# Altium PCB module_esppcb.PcbDoc
Units mm, origin at the board's own origin, x right, y up, seen from the top; angles counter-clockwise.
Board outline 67.63 x 92.03 mm, 2 copper layers (Top Layer, Bottom Layer); 21 components, 45 nets, 126 pads, 71 vias.
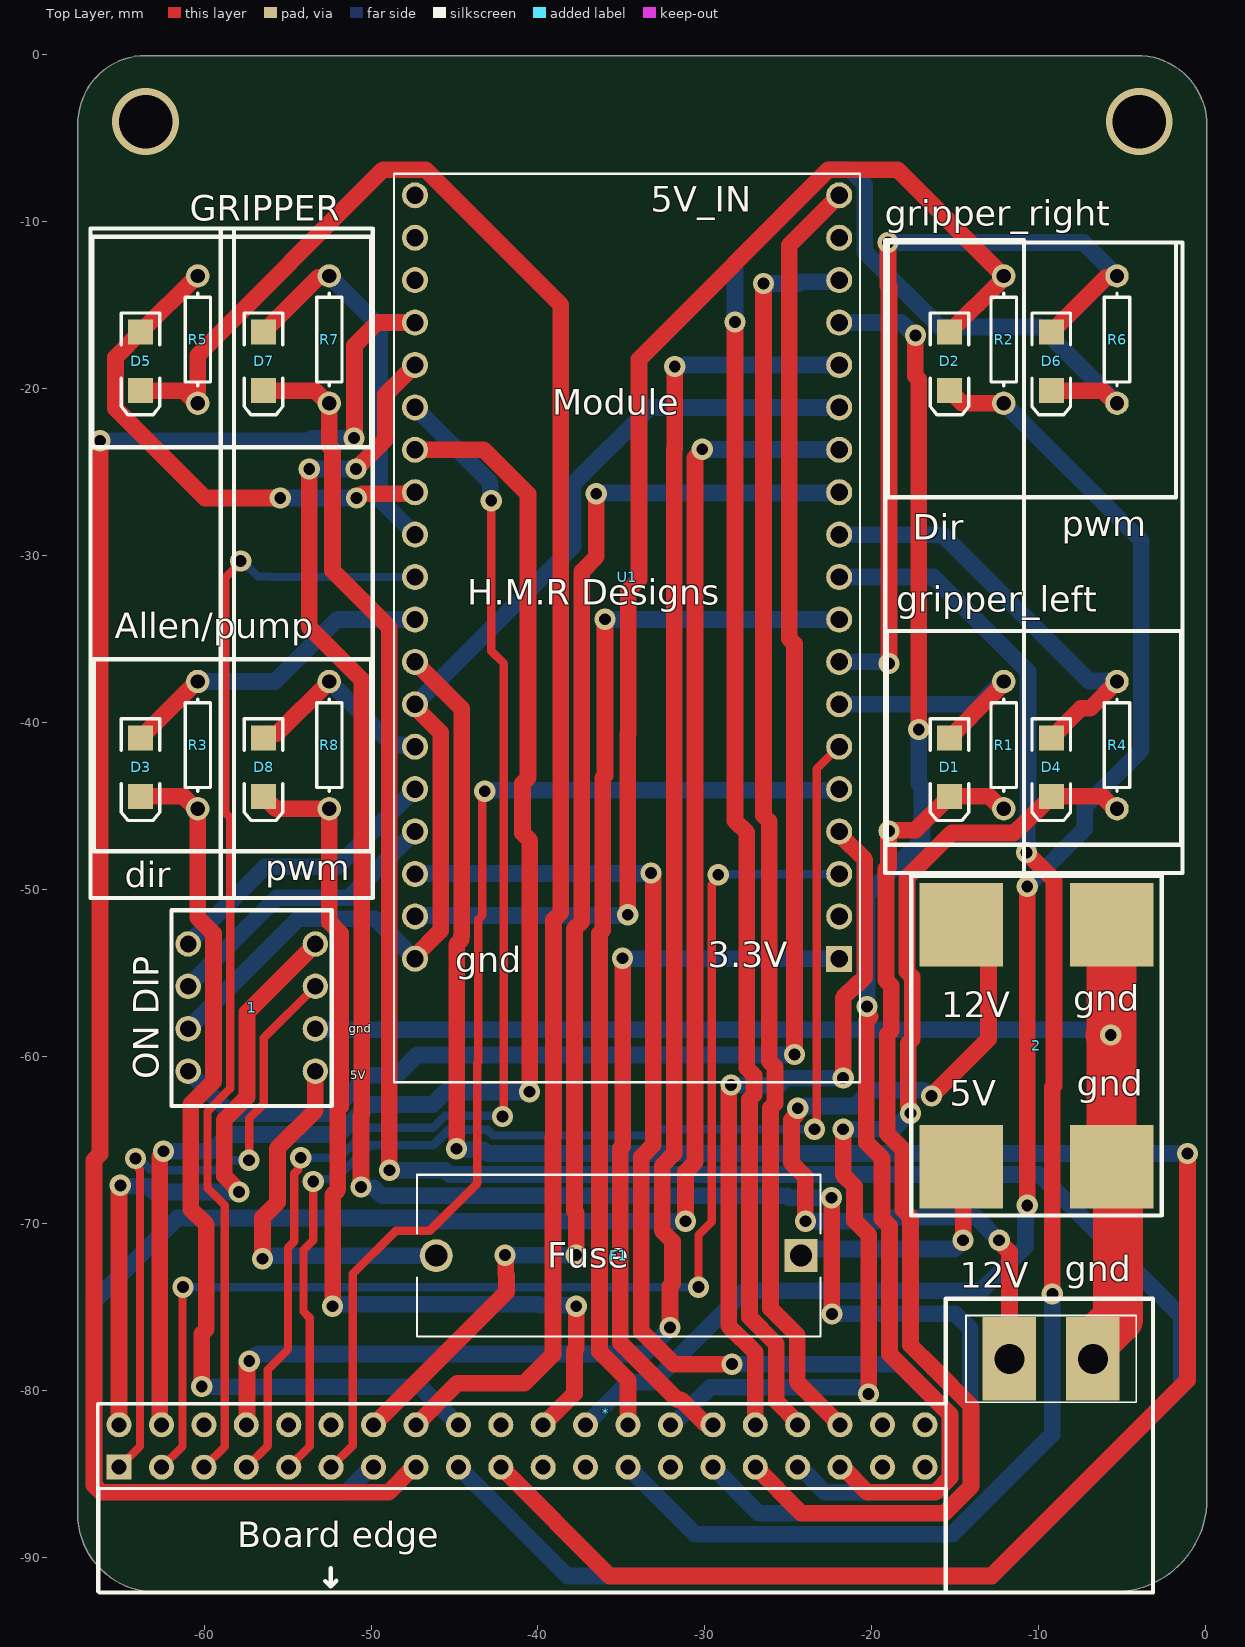
[diagram p0: Top Layer view]
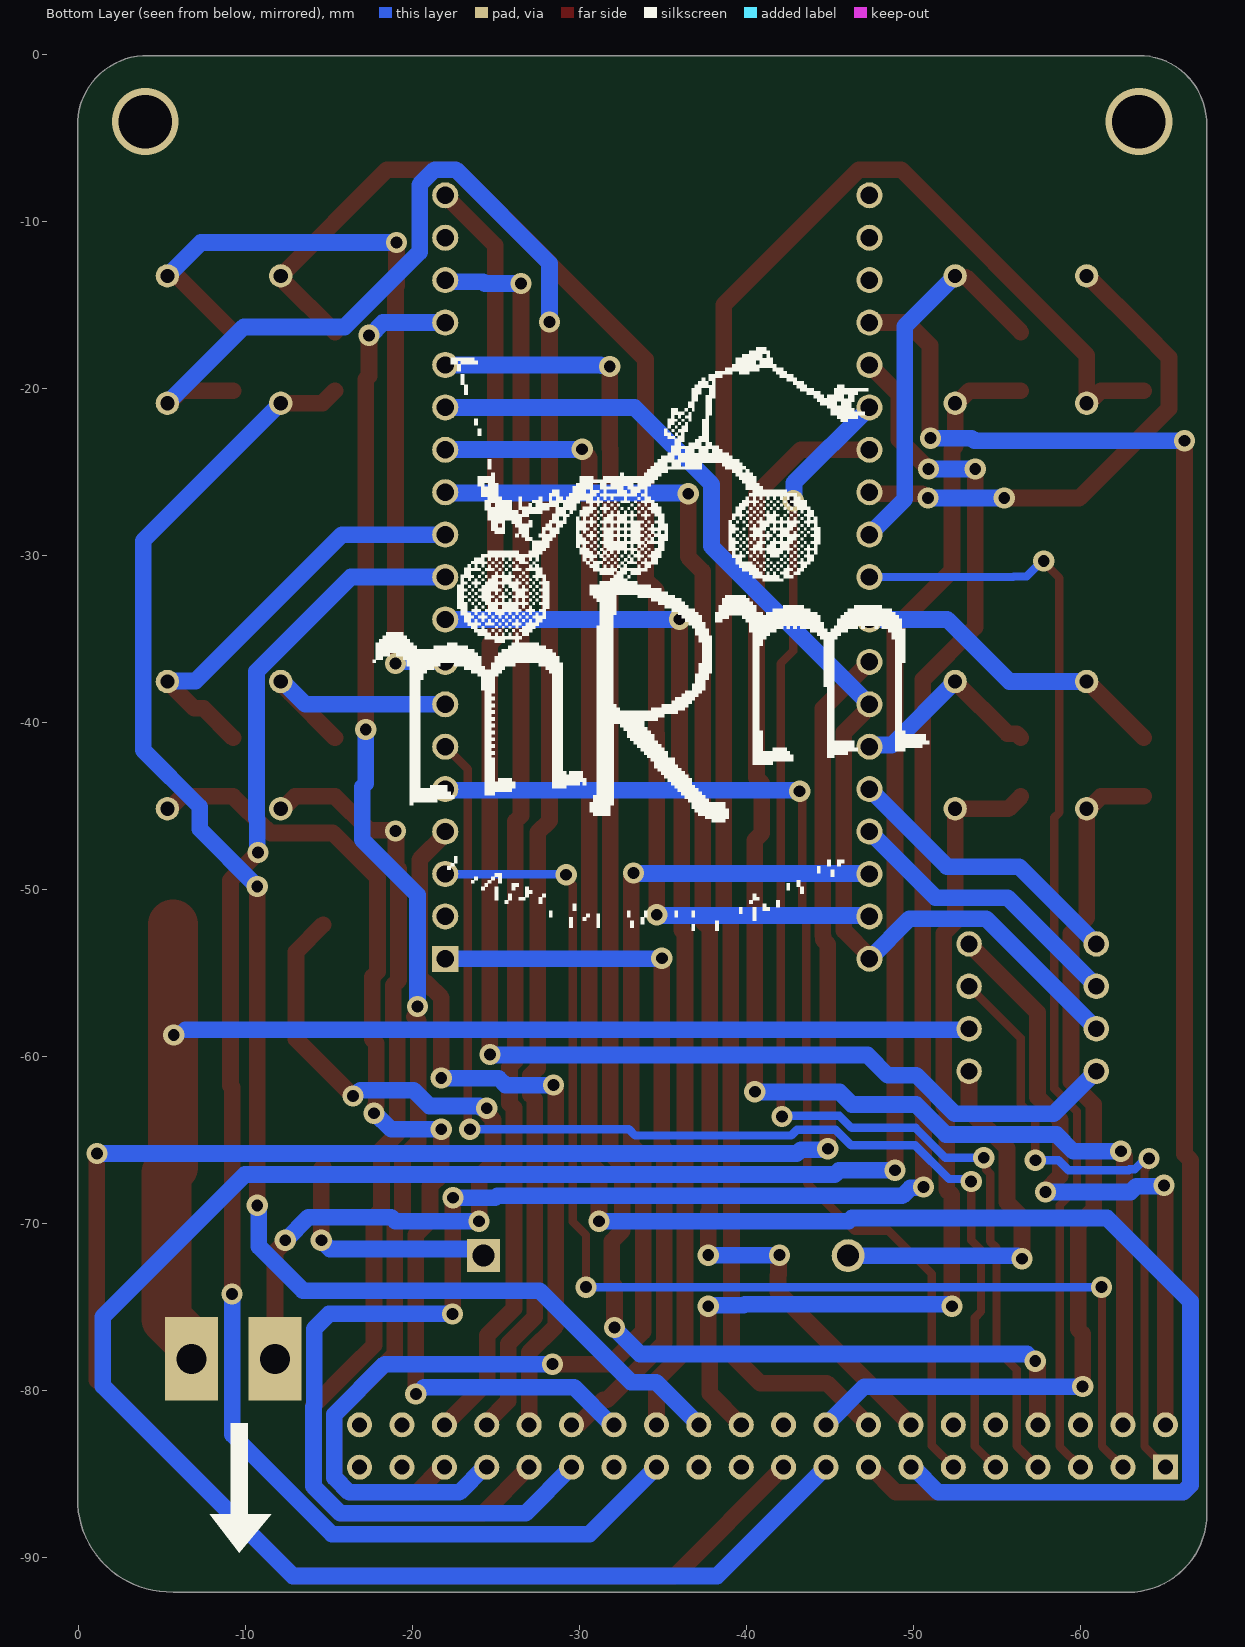
[diagram p1: Bottom Layer view, seen from below]

## Layer stack, top to bottom
Top Solder: solder mask 0.0102, Solder Resist, Dk 3.5
Top Layer: signal copper 0.0356
Dielectric 1: dielectric 0.32, FR-4, Dk 4.8
Bottom Layer: signal copper 0.0356
Bottom Solder: solder mask 0.0102, Solder Resist, Dk 3.5

## Board outline
-67.574,-87.388 -67.555,-4.22 cw(c-63.482,-4.119) -63.482,-0.044 -4.205,-0.044 cw(c-4.101,-4.203) 0.058,-4.31 0.057,-86.43 cw(c-5.516,-86.483) -5.667,-92.056 -62.891,-92.073 cw(c-62.835,-87.334)

## Design rules (kind name [scope] priority, off if disabled: settings)
Clearance [All] p1: gap=0.254 ignorepadtopadclearanceinfootprint=FALSE except(0: Arc-Hole Track-Hole SMDPad-Hole THPad-Hole Via-Hole Fill-Hole Poly-Hole Region-Hole Text-Hole)
PolygonConnect [All] p1: connectstyle=Relief reliefconductorwidth=0.254 reliefentries=4 polygonreliefangle="90 Angle" airgapwidth=0.254
RoutingVias [All] p1: holewidth=0.711 width=1.27 viastyle="Through Hole" minholewidth=0.711 minwidth=1.27 maxholewidth=0.711 maxwidth=1.27
SolderMaskExpansion [All] p1: expansion=0.102 istentingtop=FALSE
Width [All] p1: maxlimit=10 minlimit=0.254 preferedwidth=1 minimp=50.000000 maximp=50.000000 favimp=50.000000
30 further rules are at their usual default settings.

## Components (designator, comment, footprint, x,y, rotation, side; value= is the part's Value field where it differs from the comment)
1 "2.54 switch  dip" "2.54mm Pitch 4 Way DIP Slide Switch" -52.351,-62.946 r90 top
2 "microbuck" "Micro buck" -10.151,-59.342 r0 top
* "breakoutboard" "breakoutboard connections" -70.187,-84.292 r270 top
D1 "LED2" 3.2X1.6X1.1 -15.358,-42.653 r270 top
D2 "LED2" 3.2X1.6X1.1 -15.358,-18.363 r270 top
D3 "LED2" 3.2X1.6X1.1 -63.8,-42.653 r270 top
D4 "LED2" 3.2X1.6X1.1 -9.262,-42.653 r270 top
D5 "LED2" 3.2X1.6X1.1 -63.8,-18.363 r270 top
D6 "LED2" 3.2X1.6X1.1 -9.262,-18.363 r270 top
D7 "LED2" 3.2X1.6X1.1 -56.434,-18.363 r270 top
D8 "LED2" 3.2X1.6X1.1 -56.434,-42.653 r270 top
F1 "4527" FUSE_4527 -35.172,-71.915 r180 top
R1 "Res1" AXIAL-0.3 -12.111,-41.341 r270 top value=1K
R2 "Res1" AXIAL-0.3 -12.111,-17.051 r270 top value=1K
R3 "Res1" AXIAL-0.3 -60.371,-41.341 r270 top value=1K
R4 "Res1" AXIAL-0.3 -5.325,-41.341 r270 top value=1K
R5 "Res1" AXIAL-0.3 -60.371,-17.051 r270 top value=1K
R6 "Res1" AXIAL-0.3 -5.325,-17.051 r270 top value=1K
R7 "Res1" AXIAL-0.3 -52.497,-17.051 r270 top value=1K
R8 "Res1" AXIAL-0.3 -52.497,-41.341 r270 top value=1K
U1 "ESP32-DEVKITC-32D" MODULE_ESP32-DEVKITC-32D -34.662,-34.375 r180 top

## Footprints (in the part's own frame and the unit in brackets; to place one, negate y for a bottom-side part, rotate by r counter-clockwise, add the part's x,y. Pads: shape width x height; smd on the part's side, far side on the other; paste and mask are expansions set on the pad)
"2.54mm Pitch 4 Way DIP Slide Switch" [mm]
  round 1.524 hole 1: 1(2.08,0.98) 2(4.62,0.98) 3(7.16,0.98) 4(9.7,0.98) 5(2.08,8.6) 6(4.62,8.6) 7(7.16,8.6) 8(9.7,8.6)
  silkscreen extent 0,0 11.72,9.6
3.2X1.6X1.1 [mm] "SMT LED; 2 Flat Leads"
  rect 1.5x1.5 smd: 1(-1.75,0) 2(1.75,0)
  silkscreen extent -2.9,-1.15 3.2,1.15
AXIAL-0.3 [mm] "Axial Device, Thru-Hole; 2 Leads; 0.3 in Pin Spacing"
  round 1.4 hole 0.85: 1(-3.81,0) 2(3.81,0)
  silkscreen extent -2.77,-0.76 2.77,0.76
"breakoutboard connections" [mm]
  rect 1.5x1.5 hole 0.9: 1(0.29,5.1)
  round 1.5 hole 0.9: 2(-2.25,5.1) 3(0.29,7.64) 4(-2.25,7.64) 5(0.29,10.18) 6(-2.25,10.18) 7(0.29,12.72) 8(-2.25,12.72) 9(0.29,15.26) 10(-2.25,15.26) 11(0.29,17.8) 12(-2.25,17.8) 13(0.29,20.34) 14(-2.25,20.34) 15(0.29,22.88) 16(-2.25,22.88) 17(0.29,25.42) 18(-2.25,25.42) 19(0.29,27.96) 20(-2.25,27.96) 21(0.29,30.5) 22(-2.25,30.5) 23(0.29,33.04) 24(-2.25,33.04) 25(0.29,35.58) 26(-2.25,35.58) 27(0.29,38.12) 28(-2.25,38.12) 29(0.29,40.66) 30(-2.25,40.66) 31(0.29,43.2) 32(-2.25,43.2) 33(0.29,45.74) 34(-2.25,45.74) 35(0.29,48.28) 36(-2.25,48.28) 37(0.29,50.82) 38(-2.25,50.82) 39(0.29,53.36) 40(-2.25,53.36)
  rect 5x3.2 hole 1.8: Pow+(-6.198,58.421) Pow-(-6.198,63.421)
  silkscreen extent -9.8,3.83 7.79,67.02, body extent -7,55.82 5.7,66.02, height 5.3
FUSE_4527 [mm]
  rect 1.98x1.98 hole 1.32: 1(-10.92,0)
  round 1.98 hole 1.32: 2(10.92,0)
  silkscreen extent -12.08,-4.85 12.08,4.85
"Micro buck" [mm]
  rect 5x5 smd: 1(-4.5,7.25) 2(4.5,7.25) 3(-4.5,-7.25) 4(4.5,-7.25)
  silkscreen extent -7.5,-10.16 7.5,10.16
MODULE_ESP32-DEVKITC-32D [mm]
  rect 1.56x1.56 hole 1.04: 1(-12.7,19.76)
  round 1.56 hole 1.04: 2(-12.7,17.22) 3(-12.7,14.68) 4(-12.7,12.14) 5(-12.7,9.6) 6(-12.7,7.06) 7(-12.7,4.52) 8(-12.7,1.98) 9(-12.7,-0.56) 10(-12.7,-3.1) 11(-12.7,-5.64) 12(-12.7,-8.18) 13(-12.7,-10.72) 14(-12.7,-13.26) 15(-12.7,-15.8) 16(-12.7,-18.34) 17(-12.7,-20.88) 18(-12.7,-23.42) 19(-12.7,-25.96) 20(12.7,19.76) 21(12.7,17.22) 22(12.7,14.68) 23(12.7,12.14) 24(12.7,9.6) 25(12.7,7.06) 26(12.7,4.52) 27(12.7,1.98) 28(12.7,-0.56) 29(12.7,-3.1) 30(12.7,-5.64) 31(12.7,-8.18) 32(12.7,-10.72) 33(12.7,-13.26) 34(12.7,-15.8) 35(12.7,-18.34) 36(12.7,-20.88) 37(12.7,-23.42) 38(12.7,-25.96)
  silkscreen extent -13.95,-27.25 13.95,27.15

## Part data
D1 D2 D3 D4 D5 D6 D7 D8: "Typical RED, GREEN, YELLOW, AMBER GaAs LED", LatestRevisionDate=17-Jul-2002, LatestRevisionNote="Re-released for DXP Platform.", PackageDescription="SM LED; 2 Flat Leads", PackageReference=3.2X1.6X1.1, PackageVersion=Feb-2002, Published=8-Jun-2000, Publisher="Altium Limited"
F1: "Fuseholder; 5 A; 250 V; Nylon; Base only; Brass, Tin Plate (Contact)", Package=None, Availability=Unavailable, MP=4527, Price=None
R1 R2 R3 R4 R5 R6 R7 R8: "Resistor", LatestRevisionDate=17-Jul-2002, LatestRevisionNote="Re-released for DXP Platform.", PackageDescription="Axial Device, Thru-Hole; 2 Leads; 0.3 in Pin Spacing", PackageReference=AXIAL-0.3, Published=8-Jun-2000, Publisher="Altium Limited"
U1: "Eval Board For Esp-Wroom-32", Package=None, Availability=Unavailable, MP=ESP32-DEVKITC-32D, Price=None

## Via types
v1: diameter 1.27, hole 0.711, Top Layer to Bottom Layer, 69 vias
v2: diameter 4, hole 3.2, Top Layer to Bottom Layer, 2 vias

## Nets (pads, with @x,y where several pads share a name; then routed paths per layer and width w, separated by ;. In a path a pad name is that pad's centre, name@x,y a point inside that pad or via, vN(x,y) a via of type N, cw(c..) or ccw(c..) an arc to the next point about the centre after c; other vN are vias at no path point)
Net1_1: 1.1 F1.2 | length 23
  Top Layer w1: v1(-56.5,-72.1) -56.5,-69.62 -55.6,-68.72 -55.6,-65.476 -53.331,-63.207 1.1
  Bottom Layer w1: v1(-56.5,-72.1) -56.427,-72.1 -56.242,-71.915 F1.2
Net1_2: 1.2 2.2 2.4 *.Pow- | length 73.8
  Top Layer w3: *.Pow- -6.766,-77.194 -5.27,-75.698 -5.27,-66.973 2.4 -5.651,-58.749 v1(-5.7,-58.7) -5.651,-58.651 2.2
  Bottom Layer w1: 1.2 -53.268,-58.389 -6.406,-58.389
Net1_3: 1.3 *.1 | length 38.5
  Top Layer w0.5: *.1 -63.833,-83.328 -63.833,-66.778 -63.953,-66.658 -63.953,-66.247 v1(-64.1,-66.1) ; v1(-57.3,-66.2) -57.3,-63.712 -56.423,-62.835 -56.423,-58.878 1.3
  Bottom Layer w0.5: v1(-64.1,-66.1) -63.892,-66.1 -63.244,-66.748 -62.942,-66.748 -62.892,-66.798 -59.287,-66.798 -58.689,-66.2 v1(-57.3,-66.2)
Net1_4: 1.4 *.2 | length 39.1
  Top Layer w1: *.2 -65.087,-67.849 -65.011,-67.773 v1(-65.011,-67.7) ; v1(-57.9,-68.1) -57.9,-68.027 -58.789,-67.138 -58.789,-63.781 -57.427,-62.419 -57.427,-57.342 1.4
  Bottom Layer w1: v1(-65.011,-67.7) -64.959,-67.752 -63.358,-67.752 -63.01,-68.1 v1(-57.9,-68.1)
Net1_5: 1.5 U1.19 | length 91.7
  Top Layer w1: v1(-24.635,-59.858) -24.635,-35.273 -24.955,-34.953 -24.955,-11.408 U1.19
  Bottom Layer w1: 1.5 -58.409,-63.408 -52.468,-63.408 -50.17,-61.11 -48.454,-61.11 -47.244,-59.9 -24.676,-59.9 v1(-24.635,-59.858)
Net1_6: 1.6 U1.14 U1.20 U1.26 | length 68.8
  Top Layer w1: U1.20 -47.362,-53.983 -45.828,-52.449 -45.828,-40.581 -47.362,-39.047 U1.26
  Bottom Layer w1: 1.6 -54.355,-51.73 -49.767,-51.73 U1.20 ; U1.26 -37.901,-29.434 -37.901,-25.714 -33.302,-21.115 U1.14
Net1_7: 1.7 U1.23 | length 17.4
  Bottom Layer w1: 1.7 -55.641,-50.476 -51.323,-50.476 U1.23
Net1_8: 1.8 U1.24 | length 17.4
  Bottom Layer w1: 1.8 -56.319,-48.614 -52.001,-48.614 U1.24
Net2_1: 2.1 *.Pow+ | length 47.9
  Top Layer w1: v1(-24.448,-63.087) -24.5,-63.139 -24.5,-63.445 -24.822,-63.768 -24.822,-66.356 -23.989,-67.189 v1(-23.989,-69.85) ; v1(-16.44,-62.357) -13.025,-58.942 -13.025,-53.718 2.1 ; v1(-12.382,-70.993) -12.382,-71.066 -11.766,-71.682 *.Pow+
  Bottom Layer w1: v1(-24.448,-63.087) -24.396,-63.035 -24.09,-63.035 -24.008,-62.954 -21.018,-62.954 -20.062,-61.999 -16.871,-61.999 -16.513,-62.357 v1(-16.44,-62.357) ; v1(-23.989,-69.85) -18.975,-69.85 -18.729,-69.604 -13.771,-69.604 v1(-12.382,-70.993)
Net2_3: 2.3 F1.1 | length 14.2
  Top Layer w1: 2.3 -14.541,-66.702 v1(-14.541,-70.993)
  Bottom Layer w1: F1.1 -23.854,-71.517 -15.065,-71.517 v1@-14.795,-71.247
Net*_3: *.3 U1.3 | length 74.6
  Top Layer w0.5: *.3 -61.293,-83.328 -61.293,-73.839 v1(-61.254,-73.8) ; v1(-30.389,-73.8) -30.389,-70.679 -29.588,-69.878 -29.588,-49.693 -29.203,-49.308 v1(-29.203,-49.1)
  Bottom Layer w0.5: v1(-61.254,-73.8) v1(-30.389,-73.8) ; v1(-29.203,-49.1) -29.18,-49.078 -21.985,-49.078 U1.3
Net*_4: *.4 U1.32 | length 83.9
  Top Layer w1: *.4 -62.643,-81.946 -62.643,-65.955 -62.42,-65.732 v1(-62.42,-65.659) ; U1.32 -43.245,-23.655 -40.6,-26.3 -40.6,-43.301 -40.924,-43.625 -40.924,-46.604 -40.5,-47.028 v1(-40.5,-62.1)
  Bottom Layer w1: v1(-62.42,-65.659) -59.567,-65.659 -58.571,-64.662 -51.949,-64.662 -50.151,-62.865 -46.323,-62.865 -45.572,-62.114 -40.514,-62.114 v1(-40.5,-62.1)
Net*_5: *.5 U1.29 | length 67.1
  Top Layer w0.5: *.5 -58.753,-83.328 -58.753,-68.904 -59.793,-67.864 -59.793,-63.272 -58.431,-61.91 -58.431,-45.671 -58.737,-45.365 -58.737,-31.336 -57.805,-30.404 v1(-57.805,-30.31)
  Bottom Layer w0.5: v1(-57.805,-30.31) -57.711,-30.31 -56.778,-31.242 -56.018,-31.242 -55.985,-31.275 U1.29
Net*_7: *.7 U1.33 | length 77.7
  Top Layer w0.5: *.7 -56.181,-83.296 -56.181,-78.732 -54.974,-77.525 -54.974,-71.438 -54.596,-71.06 -54.596,-67.001 -54.358,-66.763 -54.358,-66.199 v1(-54.211,-66.051) ; v1(-42.8,-26.7) -42.8,-35.704 -42.046,-36.458 -42.046,-63.5 v1(-42.123,-63.577)
  Bottom Layer w0.5: v1(-54.211,-66.051) -51.918,-66.051 -50.128,-64.262 -46.3,-64.262 -45.576,-63.538 -42.162,-63.538 v1(-42.123,-63.577)
  Bottom Layer w1: U1.33 -42.852,-25.625 -42.852,-26.648 v1(-42.8,-26.7)
Net*_8: *.8 U1.15 | length 98
  Top Layer w1: *.8 -57.427,-82.002 -57.427,-78.44 -57.292,-78.305 v1(-57.292,-78.232) ; v1(-32.1,-76.211) -32.1,-73.736 -31.94,-73.576 -31.94,-71.048 -32.29,-70.698 -32.29,-70.695 -32.56,-70.425 -32.56,-66.522 -31.846,-65.808 -31.846,-23.606 -31.813,-23.573 v1(-31.813,-18.669)
  Bottom Layer w1: v1(-57.292,-78.232) -57.247,-78.232 -56.815,-77.8 -33.616,-77.8 -32.1,-76.284 v1(-32.1,-76.211) ; v1(-31.813,-18.669) -31.761,-18.617 -31.307,-18.617 -31.265,-18.575 U1.15
Net*_9: *.9 U1.6 | length 73.1
  Top Layer w0.5: *.9 -53.673,-83.328 -53.673,-75.632 -54.046,-75.259 -54.046,-71.576 -53.457,-70.987 v1(-53.457,-67.473) ; v1(-23.433,-64.343) -23.309,-64.219 -23.309,-42.782 U1.6
  Bottom Layer w0.5: v1(-53.457,-67.473) -53.31,-67.325 -52.125,-67.325 -50.1,-65.3 -46.272,-65.3 -45.344,-64.372 -43.025,-64.372 -42.681,-64.716 -33.331,-64.716 -32.958,-64.343 v1(-23.433,-64.343)
Net*_11: *.11 U1.5 | length 66.8
  Top Layer w0.5: *.11 -51.101,-83.296 -51.101,-73.009 -48.513,-70.421 -46.481,-70.421 -43.636,-67.576 -43.636,-60.404 -43.57,-60.338 -43.57,-51.77 -43.332,-51.532 -43.332,-44.247 v1(-43.185,-44.1)
  Bottom Layer w1: v1(-43.185,-44.1) -43.133,-44.048 -22.035,-44.048 U1.5
Net*_13: *.13 U1.13 | length 121
  Top Layer w1: v1(-31.171,-69.85) -31.171,-66.906 -30.592,-66.327 -30.592,-24.125 -30.162,-23.695 v1(-30.162,-23.622)
  Bottom Layer w1: *.13 -49.982,-84.582 -51.486,-86.086 -66.149,-86.086 -66.591,-85.644 -66.591,-74.656 -61.589,-69.654 -46.305,-69.654 -46.109,-69.85 v1(-31.171,-69.85) ; v1(-30.162,-23.622) -30.145,-23.639 -21.979,-23.639 U1.13
Net*_14: *.14 U1.12 | length 78.5
  Top Layer w1: *.14 -41.889,-74.084 -41.889,-73.084 -41.923,-73.05 -41.923,-71.934 v1(-41.975,-71.882) ; v1(-37.711,-71.882) -37.711,-69.344 -37.808,-69.247 -37.808,-52.328 -37.378,-51.898 -37.378,-30.93 -36.512,-30.064 v1(-36.512,-26.289)
  Bottom Layer w1: v1(-41.975,-71.882) v1(-37.711,-71.882) ; v1(-36.512,-26.289) -36.465,-26.242 -22.009,-26.242 U1.12
Net*_15: *.15 U1.35 | length 107.8
  Top Layer w1: v1(-66.23,-23.114) -66.23,-65.83 -66.591,-66.191 -66.591,-85.644 -66.149,-86.086 -48.946,-86.086 -47.442,-84.582 *.15 ; v1(-51.021,-22.956) -50.99,-22.926 -50.99,-17.399 -49.626,-16.035 U1.35
  Bottom Layer w1: v1(-66.23,-23.114) -53.656,-23.114 -53.498,-22.956 v1(-51.021,-22.956)
Net*_16: *.16 D5.2 R5.2 | length 109.3
  Top Layer w1: D5.2 -61.228,-20.113 -60.479,-20.861 R5.2 -60.371,-17.983 -49.269,-6.881 -46.727,-6.881 -38.632,-14.976 -38.632,-51.379 -39.066,-51.813 -39.066,-64.805 -39.1,-64.839 -39.1,-77.831 -40.82,-79.551 -44.816,-79.551 *.16
Net*_17: *.17 D7.2 R7.2 | length 157.6
  Top Layer w1: D7.2 -53.354,-20.113 -52.605,-20.861 R7.2 -52.497,-23.444 -52.311,-23.63 -52.311,-30.889 -48.9,-34.3 v1(-48.9,-66.8)
  Bottom Layer w1: v1(-48.9,-66.8) -45.547,-66.8 -45.293,-67.054 -9.976,-67.054 -1.46,-75.57 -1.46,-79.728 -12.834,-91.102 -38.247,-91.102 *.17
Net*_18: *.18 D3.2 R3.2 | length 56.1
  Top Layer w1: D3.2 -61.228,-44.403 -60.479,-45.151 R3.2 -60.371,-51.682 -59.435,-52.618 -59.435,-61.494 -60.797,-62.856 -60.797,-69.121 -59.865,-70.054 -59.865,-76.319 -60.134,-76.588 v1(-60.134,-79.756)
  Bottom Layer w1: v1(-60.134,-79.756) -47.053,-79.756 *.18
Net*_19: *.19 U1.27 | length 136.6
  Top Layer w1: U1.27 -44.574,-39.143 -44.574,-52.75 -44.604,-52.78 -44.604,-52.999 -44.872,-53.267 v1(-44.872,-65.511) ; *.19 -35.707,-91.102 -12.834,-91.102 -1.1,-79.368 v1(-1.1,-65.8)
  Bottom Layer w1: v1(-44.872,-65.511) -44.82,-65.563 -43.254,-65.563 -43.017,-65.8 v1(-1.1,-65.8)
Net*_22: *.22 D8.2 R8.2 | length 57.1
  Top Layer w1: D8.2 -55.686,-45.151 R8.2 -52.497,-51.936 -51.815,-52.618 -51.815,-62.98 -51.989,-63.154 -51.989,-67.969 -52.3,-68.28 v1(-52.3,-74.939) ; *.22 -37.808,-80.163 -37.808,-77.574 -37.711,-77.477 v1(-37.711,-74.939)
  Bottom Layer w1: v1(-52.3,-74.939) -52.227,-74.939 -52.11,-74.822 -39.914,-74.822 -39.846,-74.89 -37.76,-74.89 v1(-37.711,-74.939)
Net*_24: *.24 D2.2 R2.2 | length 90.9
  Top Layer w1: D2.2 -14.61,-20.861 R2.2 ; v1(-10.7,-68.9) v1(-10.7,-49.8)
  Bottom Layer w1: *.24 -34.591,-79.486 -33.086,-79.486 -27.611,-74.011 -13.436,-74.011 -10.8,-71.375 v1@-10.8,-69.1 ; R2.2 -3.871,-29.101 -3.871,-41.641 -7.26,-45.029 -7.26,-46.36 v1(-10.7,-49.8)
Net*_25: *.25 U1.10 | length 89.6
  Top Layer w1: v1(-10.748,-47.775) -9.1,-49.423 -9.1,-61.725 -9.2,-61.825 v1(-9.2,-74.2)
  Bottom Layer w1: *.25 -30.595,-88.594 -15.165,-88.594 -9.207,-82.636 -9.207,-74.207 v1(-9.2,-74.2) ; U1.10 -16.311,-31.275 -10.657,-36.929 -10.657,-45.753 -10.697,-45.793 -10.697,-47.723 v1(-10.748,-47.775)
Net*_26: *.26 U1.9 | length 63.1
  Top Layer w1: v1(-35.989,-33.8) -35.989,-43.158 -36.124,-43.293 -36.124,-52.418 -36.322,-52.616 -36.322,-77.655 -34.607,-79.37 *.26
  Bottom Layer w1: v1(-35.989,-33.8) -35.974,-33.815 U1.9
Net*_28: *.28 D4.2 R4.2 | length 63.2
  Top Layer w1: v1(-21.726,-64.343) -21.726,-67.074 -21.043,-67.757 -21.043,-69.813 -20.2,-70.656 v1(-20.2,-80.2) ; v1(-17.694,-63.388) -17.745,-63.336 -17.745,-63.016 -17.829,-62.932 -17.829,-59.193 -17.592,-58.957 -17.592,-55.217 -17.905,-54.904 -17.905,-49.28 -15.23,-46.605 -11.509,-46.605 -11.289,-46.386 -11.245,-46.386 D4.2 -6.182,-44.403 -5.433,-45.151 R4.2
  Bottom Layer w1: *.28 -31.932,-82.042 -29.69,-79.8 -20.673,-79.8 -20.273,-80.2 v1(-20.2,-80.2) ; v1(-21.726,-64.343) -18.722,-64.343 -17.767,-63.388 v1(-17.694,-63.388)
Net*_29: *.29 U1.34 | length 125.6
  Top Layer w1: v1(-53.7,-24.8) -53.7,-34.272 -50.561,-37.411 -50.561,-63.499 -50.6,-63.538 v1(-50.6,-67.8) ; v1(-50.9,-24.8) -49.14,-23.04 -49.14,-20.353 U1.34 ; v1(-22.432,-68.443) -22.416,-68.459 -22.416,-75.384 v1(-22.4,-75.4)
  Bottom Layer w1: v1(-53.7,-24.8) v1(-50.9,-24.8) ; v1(-50.6,-67.8) -50.548,-67.852 -49.813,-67.852 -49.332,-68.332 -25.067,-68.332 -24.956,-68.443 v1(-22.432,-68.443) ; *.29 -26.769,-87.34 -15.685,-87.34 -14.069,-85.724 -14.069,-80.957 -14.12,-80.906 -14.12,-76.286 -15.006,-75.4 v1(-22.4,-75.4)
Net*_30: *.30 U1.1 | length 43.7
  Top Layer w1: v1(-34.933,-54.1) -34.933,-65.348 -35.068,-65.483 -35.068,-77.136 -31.666,-80.538 -31.444,-80.538 -30.036,-81.946 -29.623,-81.946 *.30
  Bottom Layer w1: v1(-34.933,-54.1) -34.898,-54.135 U1.1
Net*_31: *.31 D1.2 R1.2 | length 64.4
  Top Layer w1: *.31 -24.229,-87.34 -15.685,-87.34 -14.069,-85.724 -14.069,-80.9 -16.322,-78.646 -17.692,-77.277 -17.692,-69.617 -18.146,-69.163 -18.146,-65.554 -19.083,-64.617 -19.083,-58.674 -18.846,-58.437 -18.846,-55.737 -19.159,-55.424 -19.159,-48.76 -19.016,-48.617 -19.016,-46.512 -18.934,-46.43 -17.386,-46.43 D1.2 -12.968,-44.403 -12.219,-45.151 R1.2
  other v1: -18.986,-46.482
Net*_32: *.32 U1.4 | length 43.9
  Top Layer w1: v1(-28.449,-61.7) -28.501,-61.752 -28.501,-61.943 -28.584,-62.026 -28.584,-76.116 -26.987,-77.713 *.32 ; U1.4 -21.962,-46.667 -20.428,-48.201 -20.428,-55.227 -20.812,-55.611 -20.875,-55.611 -21.726,-56.461 v1(-21.726,-61.274)
  Bottom Layer w1: v1(-28.449,-61.7) -25.576,-61.7 -25.165,-61.289 -21.74,-61.289 v1(-21.726,-61.274)
Net*_33: *.33 U1.22 | length 76.4
  Top Layer w1: v1(-33.235,-49) -33.235,-49.073 -33.1,-49.208 -33.1,-65.288 -33.814,-66.002 -33.814,-76.461 -31.864,-78.411 v1(-28.376,-78.411)
  Bottom Layer w1: U1.22 -47.335,-49.028 -33.263,-49.028 v1(-33.235,-49) ; v1(-28.376,-78.411) -18.331,-78.411 -15.323,-81.419 -15.323,-85.205 -16.204,-86.086 -22.808,-86.086 -24.312,-84.582 *.33
Net*_34: *.34 D6.2 R6.2 | length 108.9
  Top Layer w1: v1(-28.2,-16) -28.2,-45.872 -27.495,-46.577 -27.495,-60.69 -27.06,-61.125 -27.06,-62.275 -27.33,-62.545 -27.33,-75.597 -25.733,-77.194 -25.733,-80.621 -24.447,-81.907 *.34 ; D6.2 -6.182,-20.113 -5.433,-20.861 R6.2
  Bottom Layer w1: v1(-28.2,-16) -28.2,-12.484 -22.597,-6.881 -21.327,-6.881 -20.428,-7.78 -20.428,-11.815 -18.186,-14.057 -18.178,-14.057 -15.936,-16.3 -9.886,-16.3 R6.2
Net*_35: *.35 U1.16 | length 84
  Top Layer w1: *.35 -21.772,-84.582 -20.268,-86.086 -16.204,-86.086 -15.323,-85.205 -15.323,-81.419 -18.946,-77.796 -18.946,-70.137 -19.4,-69.683 -19.4,-66.073 -20.337,-65.137 -20.337,-57.837 v1@-20.1,-57.6 ; v1(-17.4,-16.8) -17.4,-19.235 -17.2,-19.435 v1(-17.2,-40.4)
  Bottom Layer w1: U1.16 -18.238,-16.035 -17.473,-16.8 v1(-17.4,-16.8) ; v1(-20.3,-57) -20.3,-50.313 -17,-47.013 -17,-43.843 -17.2,-43.643 v1(-17.2,-40.4)
Net*_36: *.36 U1.17 | length 75.1
  Top Layer w1: v1(-26.5,-13.7) -26.5,-45.55 -26.153,-45.897 -26.153,-60.258 -25.806,-60.605 -25.806,-62.795 -26.076,-63.065 -26.076,-75.077 -24.479,-76.674 -24.479,-79.47 *.36
  Bottom Layer w1: v1(-26.5,-13.7) -24.347,-13.7 -24.242,-13.595 -22.062,-13.595 U1.17
NetD1_1: D1.1 R1.1 U1.7 | length 15.1
  Top Layer w1: D1.1 -12.682,-38.227 -12.682,-38.211 -12.111,-37.639 R1.1
  Bottom Layer w1: U1.7 -13.583,-38.895 -12.219,-37.531 R1.1
NetD2_1: D2.1 R2.1 U1.21 | length 80.2
  Top Layer w1: v1(-34.624,-51.5) -34.624,-40.678 -34.6,-40.654 -34.6,-32.08 -33.956,-31.436 -33.956,-18.24 -22.597,-6.881 -18.471,-6.881 R2.1 -12.188,-13.318 -12.188,-13.442 D2.1
  Bottom Layer w1: U1.21 -47.315,-51.548 -34.672,-51.548 v1(-34.624,-51.5)
NetD3_1: D3.1 R3.1 U1.28 | length 19.4
  Top Layer w1: D3.1 -60.428,-37.531 R3.1
  Bottom Layer w1: R3.1 -55.746,-37.531 -52.03,-33.815 U1.28
NetD4_1: D4.1 R4.1 U1.11 | length 25.6
  Top Layer w1: D4.1 -7.489,-39.13 -6.924,-39.13 R4.1
  Bottom Layer w1: U1.11 -15.778,-28.735 -7.012,-37.501 -5.355,-37.501 R4.1
NetD5_1: D5.1 R5.1 U1.31 | length 30.2
  Top Layer w1: R5.1 -60.428,-13.241 D5.1 -65.304,-18.117 -65.304,-21.175 -59.936,-26.543 v1(-55.435,-26.543) ; v1(-50.863,-26.543) -50.79,-26.543 -50.528,-26.281 -47.448,-26.281 U1.31
  Bottom Layer w1: v1(-55.435,-26.543) v1@-50.936,-26.543
NetD6_1: D6.1 R6.1 U1.8 | length 48.1
  Top Layer w1: v1(-19.039,-11.239) -19.039,-13.822 -18.986,-13.875 v1(-18.986,-36.449) ; D6.1 -5.967,-13.318 -5.402,-13.318 R6.1
  Bottom Layer w1: U1.8 -19.08,-36.355 v1(-18.986,-36.449) ; v1(-19.039,-11.239) -7.327,-11.239 R6.1
NetD7_1: D7.1 R7.1 U1.30 | length 23
  Top Layer w1: D7.1 -53.139,-13.318 -52.574,-13.318 R7.1
  Bottom Layer w1: R7.1 -49.474,-16.264 -49.474,-26.623 U1.30
NetD8_1: D8.1 R8.1 U1.25 | length 12.1
  Top Layer w1: D8.1 -56.184,-40.653 -55.619,-40.653 R8.1
  Bottom Layer w1: R8.1 -48.7,-41.328 -47.469,-41.328 U1.25
pads on no net: *.6 *.10 *.12 *.20 *.21 *.23 *.27 *.37 *.38 *.39 *.40 U1.2 U1.18 U1.36 U1.37 U1.38
copper on no net:
  other v2: -63.5,-4 -4,-4

## Silkscreen, mask and mechanical layers (free items; w line width, h text height)
Top Overlay:
  lines w0.254: -10.9,-49 -1.4,-49 -1.4,-11.239 -10.9,-11.239 -10.9,-49 ; -10.9,-49 -19.2,-49 -19.2,-11.1 -10.9,-11.1 -10.9,-49 ; -66.8,-50.5 -58.2,-50.5 -58.2,-10.4 -66.8,-10.4 -66.8,-50.5 ; -66.7,-23.5 -50,-23.5 -50,-10.9 -66.7,-10.9 -66.7,-23.5 ; -66.6,-47.7 -50,-47.7 -50,-36.2 -66.6,-36.2 -66.6,-47.7 ; -59,-50.5 -49.9,-50.5 -49.9,-10.4 -59,-10.4 -59,-50.5 ; -19.1,-47.3 -1.5,-47.3 -1.5,-34.5 -19.1,-34.5 -19.1,-47.3 ; -19.049,-26.5 -1.8,-26.5 -1.8,-11.239 -19.049,-11.239 -19.049,-26.5
  text "5V_IN" at -33.246,-9.392 h1.52
  text "GRIPPER" at -60.846,-9.946 h1.52
  text "gripper_right" at -19.246,-10.238 h1.52
  text "Module" at -39.146,-21.546 h1.52
  text "pwm" at -8.646,-28.838 h1.52
  text "Dir" at -17.546,-29.046 h1.52
  text "H.M.R Designs" at -44.246,-32.938 h1.52
  text "gripper_left" at -18.546,-33.338 h1.52
  text "Allen/pump" at -65.346,-34.938 h1.52
  text "pwm" at -56.346,-49.438 h1.52
  text "dir" at -64.746,-49.846 h1.52
  text "3.3V" at -29.846,-54.646 h1.52
  text "gnd" at -44.946,-54.938 h1.52
  text "gnd" at -7.946,-57.238 h1.52
  text "12V" at -15.846,-57.646 h1.52
  text "gnd" at -51.337,-58.568 h0.5
  text "5V" at -51.237,-61.335 h0.5
  text "gnd" at -7.746,-62.338 h1.52
  text "5V" at -15.346,-62.946 h1.52
  text "Fuse" at -39.446,-72.646 h1.52
  text "gnd" at -8.446,-73.438 h1.52
  text "12V" at -14.746,-73.846 h1.52
Bottom Overlay:
  drawing of 42 lines, arcs and shapes, not listed
Mechanical 15:
  the board outline again, w0.254

## Text inside footprints (layer, text, board x,y; h text height)
1: Top Overlay "ON DIP" at -62.705,-61.342 h1.52 r90
*: Top Overlay "Board edge" at -58.003,-89.37 h1.52